# EAGLE board EthernetBoard_panel (EAGLE 6.1)
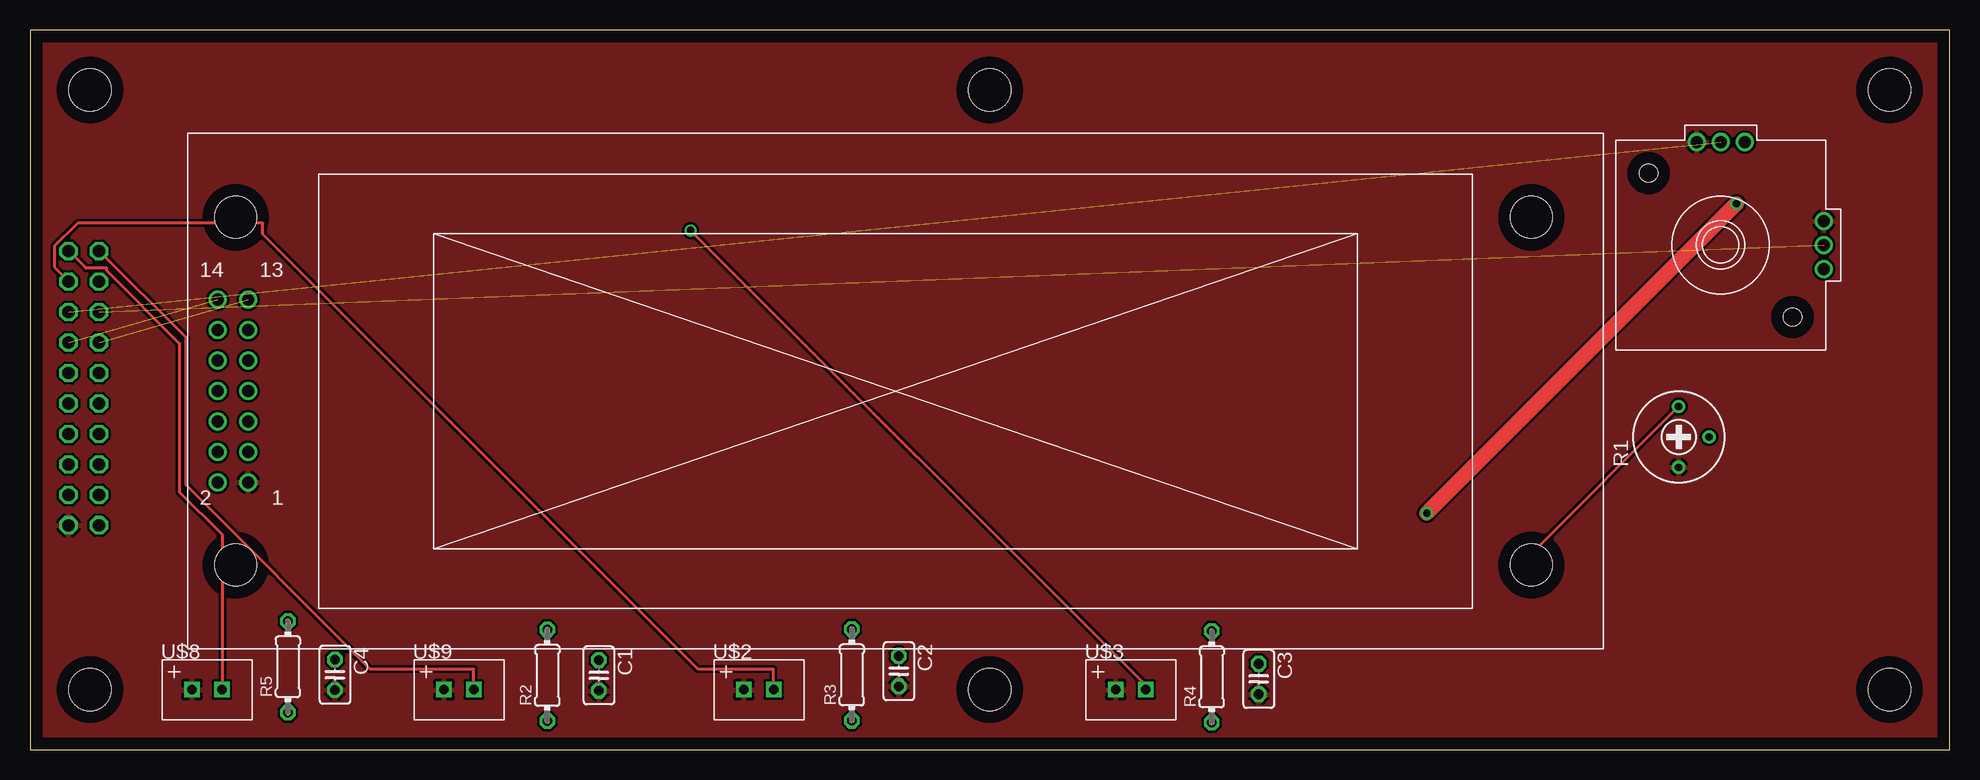
[diagram p0: board, top side]
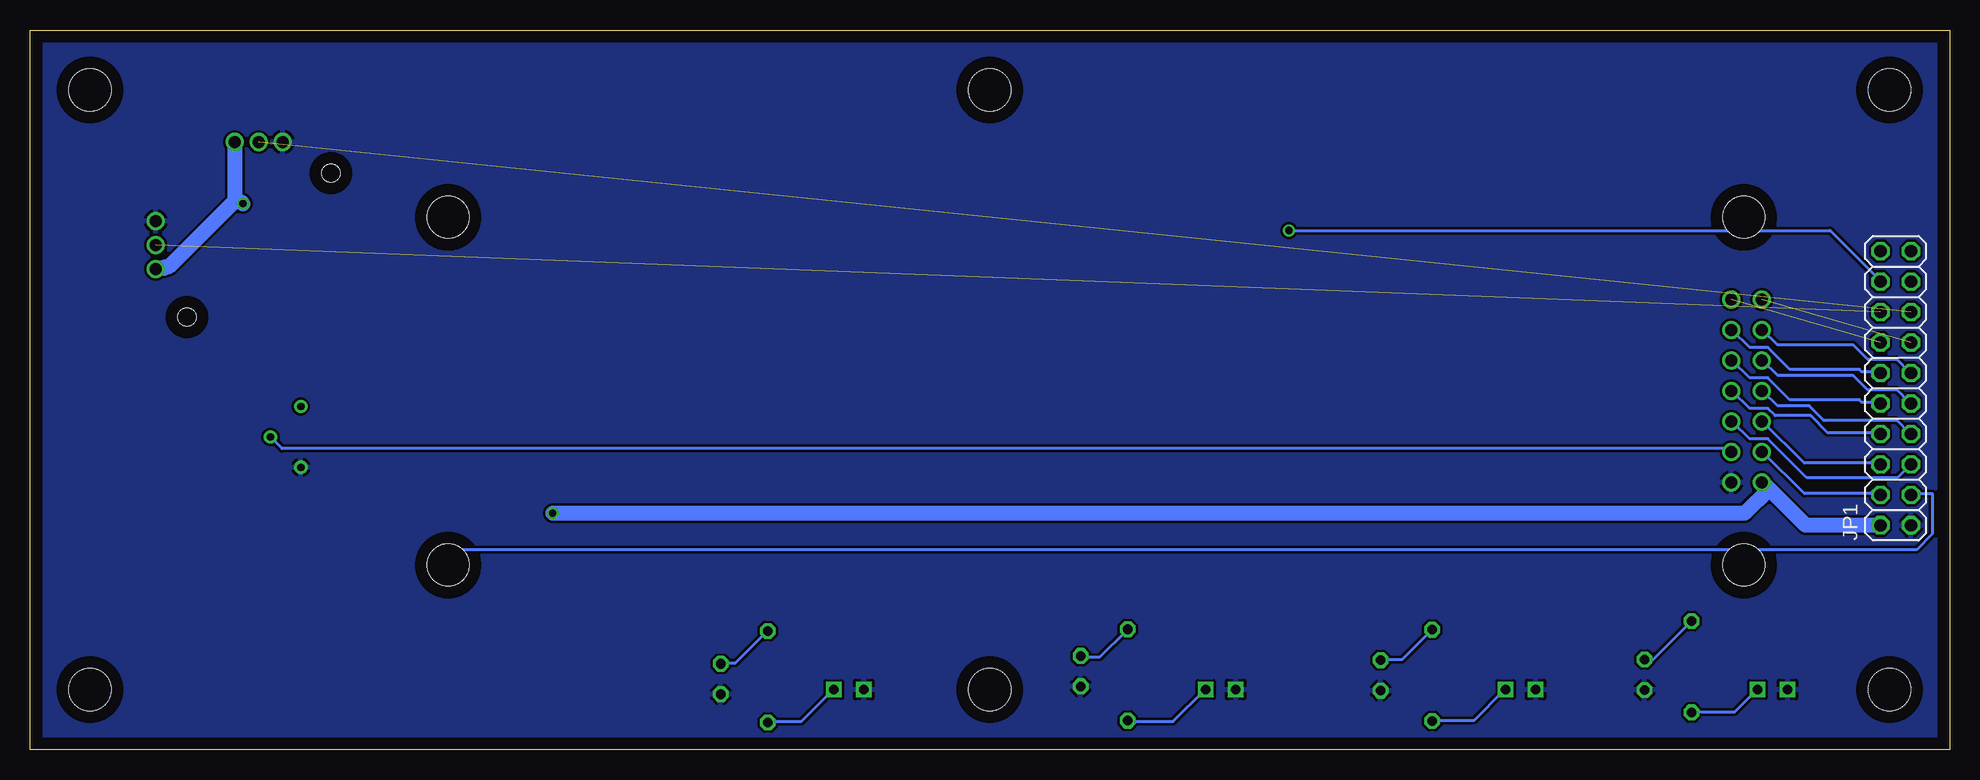
[diagram p1: board, bottom side, seen from below]

Size 160 x 60 mm. Coordinates in mm from the lower left corner, seen from the top.
Outline: 0,0 160,0 160,60 0,60 0,0
Copper layers (1*16): Top 0.035mm / dielectric 1.5mm / Bottom 0.035mm
Design rules: minimum track width 10mil, minimum drill 24mil, track to track 8mil, track to pad 8mil, pad to pad 8mil, via to via 8mil, smd to smd 8mil, copper to edge 40mil, drill to drill 8mil, minimum pad ring 10mil, minimum via ring 8mil, stop-mask expansion 4mil, vias tented up to drill 0mil, thermal gap 10mil
Net classes: 1 5v: width 0.508 mm; 2 supply_5v: width 1.27 mm, drill 0.508 mm, clearance 0.508 mm; 4 gnd: width 0.254 mm, drill 1.016 mm
Holes 3.5 mm at 5,5 5,55 155,5 155,55 80,5 80,55

## Footprints (pad centres in the part's own frame; a part is rotated, then mirrored left to right if it is on the bottom)
C025-025X050 = drill 0.813 octagon: 1 -1.27,0; 2 1.27,0
2X10 = drill 1.016 octagon: 1 -11.43,-1.27; 2 -11.43,1.27; 3 -8.89,-1.27; 4 -8.89,1.27; 5 -6.35,-1.27; 6 -6.35,1.27; 7 -3.81,-1.27; 8 -3.81,1.27; 9 -1.27,-1.27; 10 -1.27,1.27; 11 1.27,-1.27; 12 1.27,1.27; 13 3.81,-1.27; 14 3.81,1.27; 15 6.35,-1.27; 16 6.35,1.27; 17 8.89,-1.27; 18 8.89,1.27; 19 11.43,-1.27; 20 11.43,1.27
RTRIM3339P = drill 0.61: 1 -2.54,0; 2 0,-2.54; 3 2.54,0
0204/7 = drill 0.813 octagon: 1 -3.81,0; 2 3.81,0
SC2004 = drill 1: 1 5.04,13.88; 2 2.5,13.88; 3 5.04,16.42; 4 2.5,16.42; 5 5.04,18.96; 6 2.5,18.96; 7 5.04,21.5; 8 2.5,21.5; 9 5.04,24.04; 10 2.5,24.04; 11 5.04,26.58; 12 2.5,26.58; 13 5.04,29.12; 14 2.5,29.12 | hole 3.5: 4,36; 4,7; 112,7; 112,36
XH-2 = drill 0.8 square: P$1 -2.5,0; P$2 0,0
JT8P-3.2T-B10K-1-16Y = drill 1: 1 2,8.6; 2 0,8.6; 3 -2,8.6; '1 8.6,-2; '2 8.6,0; '3 8.6,2 | hole 1.5: 6,-6; -6,6

## Placement (x,y rotation side)
C1  1u  [C025-025X050]  47.42,6.18 270 top
C2  1u  [C025-025X050]  72.42,6.53 270 top
C3  1u  [C025-025X050]  102.42,5.88 270 top
C4  1u  [C025-025X050]  25.42,6.23 270 top
JP1  [2X10]  4.48,30.13 90 bottom
R1  10k  [RTRIM3339P]  137.43,26.06 90 top
R2  4.7k  [0204/7]  43.12,6.18 90 top
R3  4.7k  [0204/7]  68.5,6.22 90 top
R4  4.7k  [0204/7]  98.5,6.06 90 top
R5  4.7k  [0204/7]  21.5,6.9 90 top
U$1  SC2004  [SC2004]  13.14,8.39 0 top
U$2  XH-2  [XH-2]  62,5 0 top
U$3  XH-2  [XH-2]  93,5 0 top
U$4  JT8P-3.2T-B10K-1-16Y  [JT8P-3.2T-B10K-1-16Y]  140.92,42.06 0 top
U$8  XH-2  [XH-2]  16,5 0 top
U$9  XH-2  [XH-2]  37,5 0 top

## Library data of the parts
C1-C4 R1-R5 = rcl
JP1 = pinhead
U$1-U$4 U$8 U$9 = myparts

## Nets
+5V [supply_5v]: JP1.2 U$1.2 U$4.1 U$4.'1
GND [gnd]: C1.2 C2.2 C3.2 C4.2 JP1.1 R1.1 U$1.1 U$2.P$1 U$3.P$1 U$4.3 U$4.'3 U$8.P$1 U$9.P$1
LCD_DB0: JP1.8 U$1.7
LCD_DB1: JP1.7 U$1.8
LCD_DB2: JP1.10 U$1.9
LCD_DB3: JP1.9 U$1.10
LCD_DB4: JP1.12 U$1.11
LCD_DB5: JP1.11 U$1.12
LCD_DB6: JP1.14 U$1.13
LCD_DB7: JP1.13 U$1.14
LCD_E: JP1.6 U$1.6
LCD_RS: JP1.4 U$1.4
LCD_RW: JP1.5 U$1.5
LCD_SW1: JP1.19 R5.1 U$8.P$2
LCD_SW2: JP1.20 R2.1 U$9.P$2
LCD_SW3: JP1.17 R3.1 U$2.P$2
LCD_SW4: JP1.18 R4.1 U$3.P$2
LCD_SW5: JP1.15 U$4.2
LCD_SW6: JP1.16 U$4.'2
LCD_VO: R1.2 U$1.3
N$1: JP1.3 R1.3
N$3: C1.1 R2.2
N$4: C2.1 R3.2
N$5: C3.1 R4.2
N$6: C4.1 R5.2

## Tracks (layer width: path | path; a pad name or v marks a point on that pad's centre or on a via)
+5V  (via drill 0.61)
  Top 1.27: v142.24,45.52 v116.43,19.71
  Bottom 1.27: 15.04,21.74 11.99,18.69 5.79,18.69 JP1.2 | 15.04,21.74 15.54,22.25 U$1.2 | 142.95,45.72 148.44,40.23 148.74,40.23 148.84,40.13 149.45,40.13 U$4.'1 | 142.95,45.72 142.95,50.6 U$4.1 | 15.04,21.74 17.07,19.71 v116.43,19.71 | v142.24,45.52 142.34,45.62 142.95,45.72
GND
  pour Bottom: -0.2,62.99 -1.63,62.99 -1.63,-3.25 161.95,-3.25 161.95,62.99 0,62.99
  pour Top: -4.88,67.06 -4.88,-5.49 167.44,-5.49 167.44,66.65
LCD_DB0
  Bottom 0.254: U$1.7 18.09,29.87 16.66,28.45 15.14,28.45 14.53,27.84 11.58,27.84 10.16,26.42 5.79,26.42 JP1.8
LCD_DB1
  Bottom 0.254: U$1.8 15.54,29.87 14.33,28.65 11.68,28.65 10.46,27.43 4.37,27.43 3.35,26.42 3.25,26.42 JP1.7
LCD_DB2
  Bottom 0.254: U$1.9 18.09,32.41 16.66,30.99 15.14,30.99 13.31,29.16 7.52,29.16 7.32,28.96 5.79,28.96 JP1.10
LCD_DB3
  Bottom 0.254: U$1.10 15.54,32.41 14.33,31.19 8.03,31.19 6.81,29.97 4.37,29.97 3.35,28.96 3.25,28.96 JP1.9
LCD_DB4
  Bottom 0.254: U$1.11 18.09,34.95 16.66,33.53 15.14,33.53 13.31,31.7 7.52,31.7 7.32,31.5 5.79,31.5 JP1.12
LCD_DB5
  Bottom 0.254: U$1.12 15.54,34.95 14.33,33.73 8.03,33.73 6.81,32.51 4.37,32.51 3.35,31.5 3.25,31.5 JP1.11
LCD_DB6  (1 unrouted)
LCD_DB7  (1 unrouted)
LCD_E
  Bottom 0.254: U$1.6 15.54,27.33 12.09,23.88 5.79,23.88 JP1.6
LCD_RS
  Bottom 0.254: U$1.4 15.54,24.79 12.09,21.34 5.79,21.34 JP1.4
LCD_RW
  Bottom 0.254: U$1.5 18.09,27.33 16.66,25.91 15.14,25.91 11.89,22.66 4.37,22.66 3.25,23.77 JP1.5
LCD_SW1
  Top 0.254: JP1.19 3.25,41.55 4.67,40.13 6.4,40.13 6.4,39.93 12.5,33.83 12.5,21.44 16.05,17.88 16.05,5.08 U$8.P$2
  Bottom 0.254: U$8.P$2 16.05,4.98 17.88,3.15 21.44,3.15 R5.1
LCD_SW2
  Top 0.254: JP1.20 5.79,41.55 13.01,34.34 13.01,22.05 28.35,6.71 36.98,6.71 36.98,5.08 U$9.P$2
  Bottom 0.254: U$9.P$2 37.08,4.98 39.62,2.44 43.08,2.44 R2.1
LCD_SW3
  Top 0.254: JP1.17 3.15,39.12 2.03,40.23 2.03,41.96 3.96,43.89 19.41,43.89 19.41,42.98 55.68,6.71 61.98,6.71 61.98,5.08 U$2.P$2
  Bottom 0.254: U$2.P$2 62.08,4.98 64.72,2.34 68.48,2.34 R3.1
LCD_SW4  (via drill 0.61)
  Top 0.254: v55.07,43.28 92.96,5.38 92.96,5.08 U$3.P$2
  Bottom 0.254: U$3.P$2 93.07,4.98 95.71,2.34 98.45,2.34 R4.1 | v55.07,43.28 9.96,43.28 5.79,39.12 JP1.18
LCD_SW5  (1 unrouted)
LCD_SW6  (1 unrouted)
LCD_VO
  Bottom 0.254: R1.2 139.9,26.01 138.99,25.09 18.9,25.09 18.59,24.79 18.19,24.79 U$1.3
N$1  (via drill 0.61)
  Top 0.254: v125.48,16.66 137.36,28.55 R1.3
  Bottom 0.254: v125.48,16.66 2.74,16.66 1.42,17.98 1.42,21.34 3.15,21.34 JP1.3
N$3
  Bottom 0.254: R2.2 43.18,9.96 45.62,7.52 47.35,7.52 C1.1
N$4
  Bottom 0.254: R3.2 68.58,9.96 70.81,7.72 72.34,7.72 C2.1
N$5
  Bottom 0.254: R4.2 98.55,9.86 101.19,7.21 102.41,7.21 C3.1
N$6
  Bottom 0.254: R5.2 21.54,10.67 24.69,7.52 25.4,7.52 C4.1